# EAGLE board PowerBoard_4Array (EAGLE 5.07)
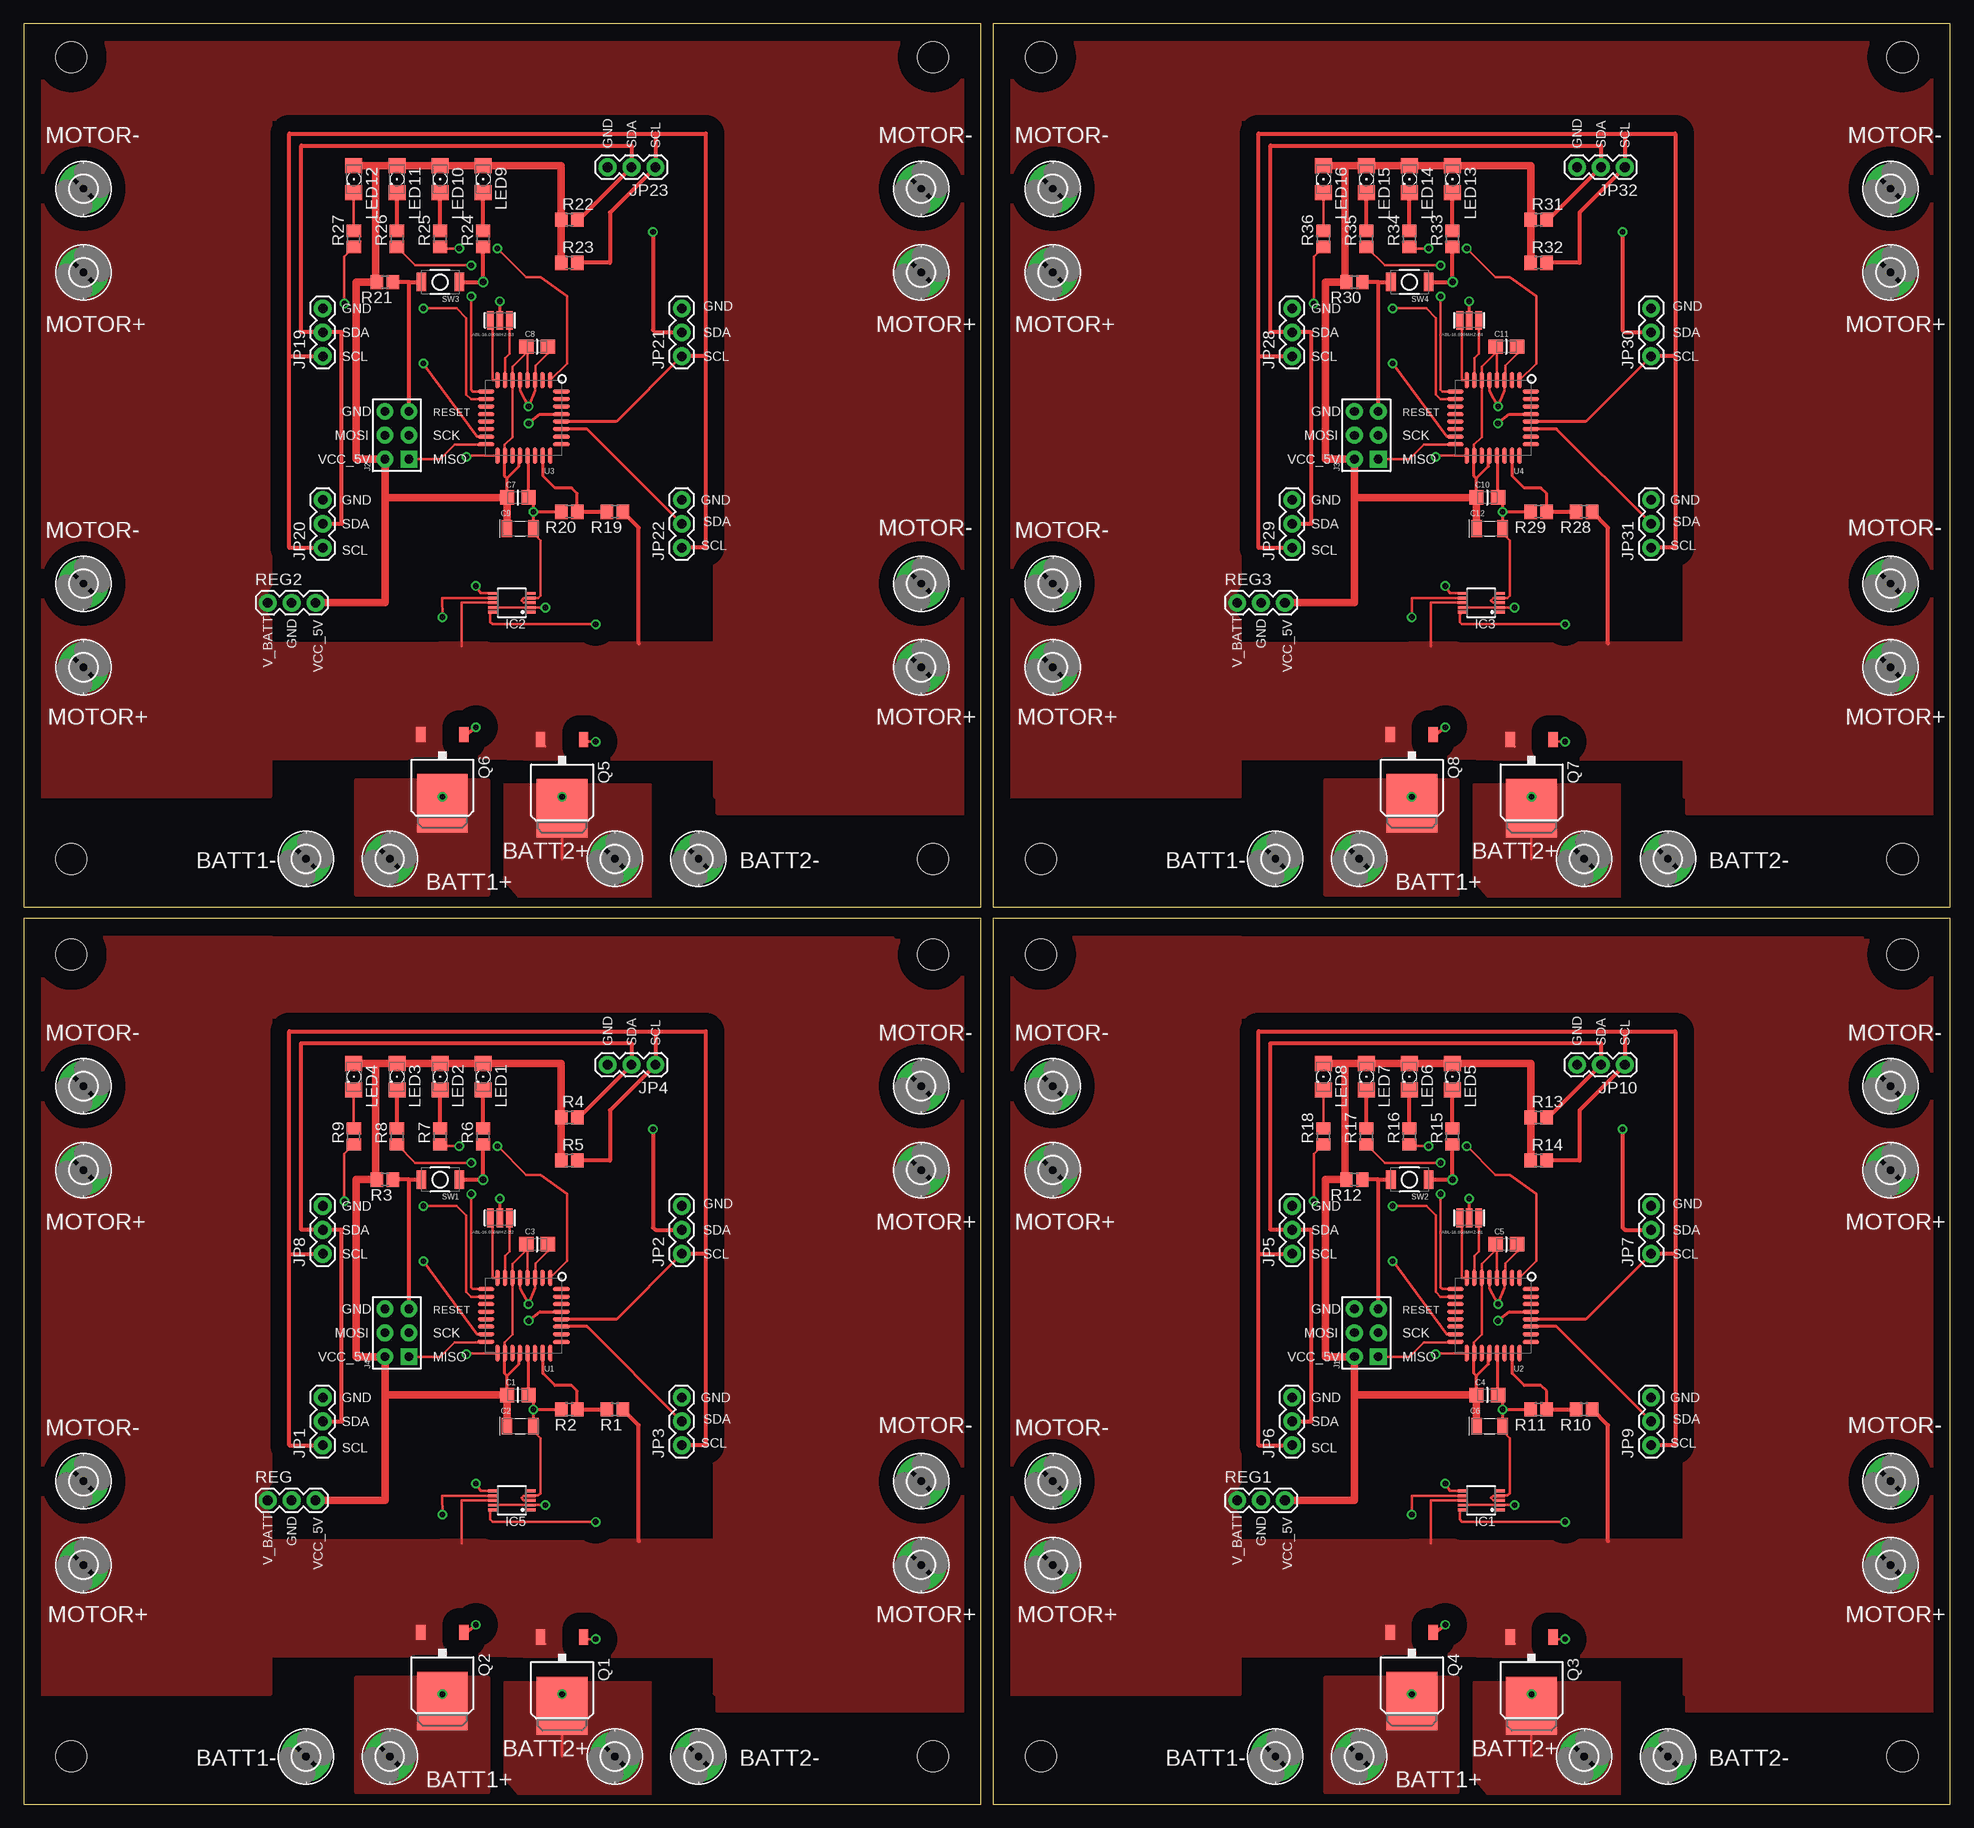
[diagram p0: board, top side]
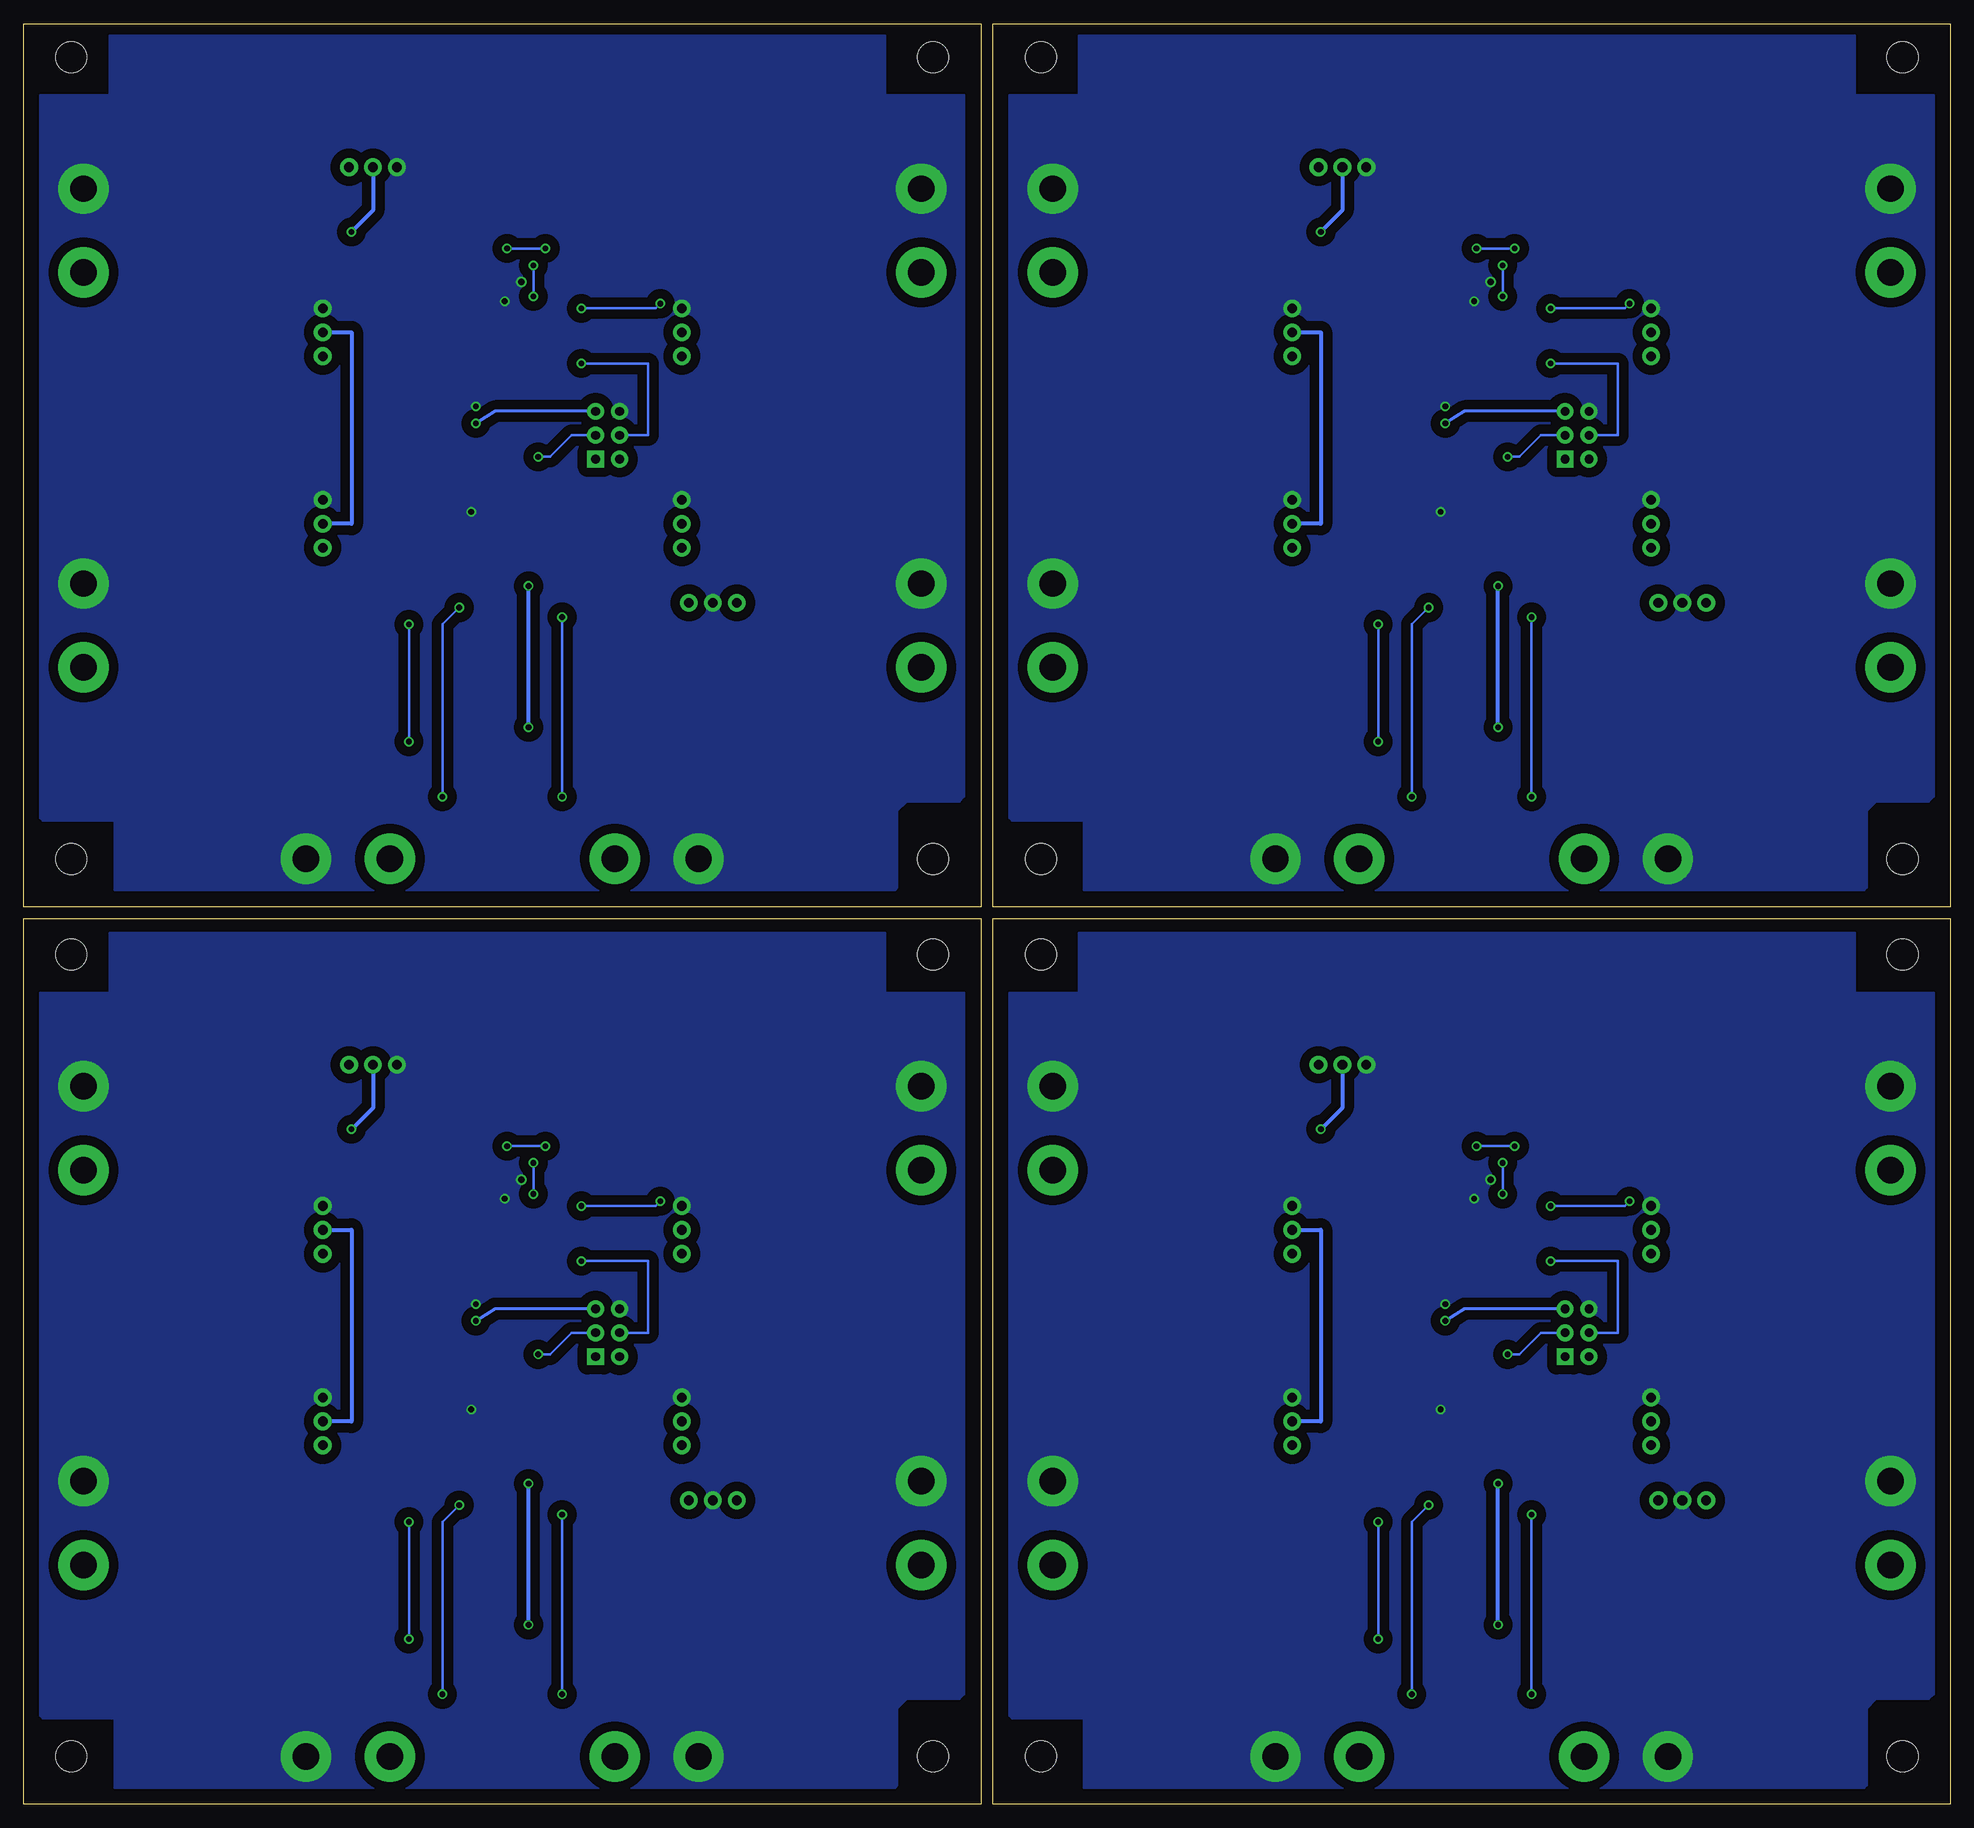
[diagram p1: board, bottom side, seen from below]

Size 204.47 x 188.98 mm. Coordinates in mm from the lower left corner, seen from the top.
Outline: 0,0 101.6,0 101.6,93.98 0,93.98 0,0
Outline: 102.87,0 204.47,0 204.47,93.98 102.87,93.98 102.87,0
Outline: 0,95.25 101.6,95.25 101.6,188.98 0,188.98 0,95.25
Outline: 102.87,95.25 204.47,95.25 204.47,188.98 102.87,188.98 102.87,95.25
Copper layers (1*16): Top 0.035mm / dielectric 1.5mm / Bottom 0.035mm
Design rules "default": minimum track width 10mil, minimum drill 24mil, track to track 8mil, track to pad 8mil, pad to pad 8mil, via to via 8mil, smd to smd 8mil, copper to edge 40mil, drill to drill 8mil, minimum pad ring 10mil, minimum via ring 8mil, stop-mask expansion 4mil, vias tented up to drill 0mil, thermal gap 10mil

## Footprints (pad centres in the part's own frame; a part is rotated, then mirrored left to right if it is on the bottom)
RESONATOR = smd 0.7 x 2: 1 -1,0; 2 0,0; 3 1,0
CAP0805-NP = smd 1.524 x 1.524: 1 0,0; 2 2.286,0
TAN-A = smd 1.118 x 1.778: 1 0,0; 2 2.794,0
2,8-PAD = drill 2.8 pad 5.334 round: B2,8 0,0
MSOP10 = smd 0.31 x 0.9: 1 -1,-2.05; 2 -0.5,-2.05; 3 0,-2.05; 4 0.5,-2.05; 5 1,-2.05; 6 1,2.05; 7 0.5,2.05; 8 0,2.05; 9 -0.5,2.05; 10 -1,2.05
HEAD3X2 = drill 0.914 pad 1.778 square: 1 0,0 | drill 0.914 pad 1.778 round: 2 0,2.54; 3 2.54,0; 4 2.54,2.54; 5 5.08,0; 6 5.08,2.54
1X03 = drill 1.016 pad 1.88 round: 1 0,0; 2 2.54,0; 3 5.08,0
STAND-OFF = hole 3.302: 0,0
1206 = smd 1.6 x 1.803: A -1.422,0; C 1.422,0
D-PAK_TO252AA = smd 1 x 1.6: 1 -2.28,-4.8; 3 2.28,-4.8 | smd 5.4 x 6.2: 4 0,2.5
R0805 = smd 1.3 x 1.5: 1 -0.85,0; 2 0.85,0
157SW = smd 1.016 x 1.981: 1 0,0; 2 4,0
QFP032 = smd 0.432 x 1.778: 1 0,0; 2 0.8,0; 3 1.599,0; 4 2.399,0; 5 3.199,0; 6 3.998,0; 7 4.798,0; 8 5.598,0; 17 5.588,8.001; 18 4.798,7.997; 19 3.998,7.997; 20 3.199,7.997; 21 2.399,7.997; 22 1.599,7.997; 23 0.799,7.997; 24 0,7.997 | smd 1.778 x 0.432: 9 6.807,1.194; 10 6.807,2.007; 11 6.807,2.794; 12 6.807,3.607; 13 6.807,4.394; 14 6.807,5.182; 15 6.807,5.994; 16 6.816,6.803; 25 -1.194,6.807; 26 -1.194,5.994; 27 -1.194,5.182; 28 -1.194,4.394; 29 -1.194,3.607; 30 -1.194,2.794; 31 -1.194,2.007; 32 -1.194,1.194

## Placement (x,y rotation side)
ABL-16.000MHZ-B1  16MHz  [RESONATOR]  153.42,62.23 180 top
ABL-16.000MHZ-B2  16MHz  [RESONATOR]  50.55,62.23 180 top
ABL-16.000MHZ-B3  16MHz  [RESONATOR]  50.55,157.48 180 top
ABL-16.000MHZ-B4  16MHz  [RESONATOR]  153.42,157.48 180 top
C1  0.1uF  [CAP0805-NP]  51.31,43.43 0 top
C2  4.7uF  [TAN-A]  51.31,40.13 0 top
C3  0.1uF  [CAP0805-NP]  53.34,59.44 0 top
C4  0.1uF  [CAP0805-NP]  154.18,43.43 0 top
C5  0.1uF  [CAP0805-NP]  156.21,59.44 0 top
C6  4.7uF  [TAN-A]  154.18,40.13 0 top
C7  0.1uF  [CAP0805-NP]  51.31,138.68 0 top
C8  0.1uF  [CAP0805-NP]  53.34,154.69 0 top
C9  4.7uF  [TAN-A]  51.31,135.38 0 top
C10  0.1uF  [CAP0805-NP]  154.18,138.68 0 top
C11  0.1uF  [CAP0805-NP]  156.21,154.69 0 top
C12  4.7uF  [TAN-A]  154.18,135.38 0 top
H1  MOUNT-PAD-ROUND2.8  [2,8-PAD]  6.35,25.4 0 top
H2  MOUNT-PAD-ROUND2.8  [2,8-PAD]  6.35,34.29 0 top
H3  MOUNT-PAD-ROUND2.8  [2,8-PAD]  6.35,67.31 0 top
H4  MOUNT-PAD-ROUND2.8  [2,8-PAD]  6.35,76.2 0 top
H5  MOUNT-PAD-ROUND2.8  [2,8-PAD]  95.25,25.4 0 top
H6  MOUNT-PAD-ROUND2.8  [2,8-PAD]  95.25,34.29 0 top
H7  MOUNT-PAD-ROUND2.8  [2,8-PAD]  95.25,67.31 0 top
H8  MOUNT-PAD-ROUND2.8  [2,8-PAD]  95.25,76.2 0 top
H9  MOUNT-PAD-ROUND2.8  [2,8-PAD]  62.74,5.08 0 top
H10  MOUNT-PAD-ROUND2.8  [2,8-PAD]  29.97,5.08 0 top
H11  MOUNT-PAD-ROUND2.8  [2,8-PAD]  38.86,5.08 0 top
H12  MOUNT-PAD-ROUND2.8  [2,8-PAD]  71.63,5.08 0 top
H13  MOUNT-PAD-ROUND2.8  [2,8-PAD]  109.22,25.4 0 top
H14  MOUNT-PAD-ROUND2.8  [2,8-PAD]  109.22,34.29 0 top
H15  MOUNT-PAD-ROUND2.8  [2,8-PAD]  109.22,67.31 0 top
H16  MOUNT-PAD-ROUND2.8  [2,8-PAD]  109.22,76.2 0 top
H17  MOUNT-PAD-ROUND2.8  [2,8-PAD]  198.12,25.4 0 top
H18  MOUNT-PAD-ROUND2.8  [2,8-PAD]  198.12,34.29 0 top
H19  MOUNT-PAD-ROUND2.8  [2,8-PAD]  198.12,67.31 0 top
H20  MOUNT-PAD-ROUND2.8  [2,8-PAD]  198.12,76.2 0 top
H21  MOUNT-PAD-ROUND2.8  [2,8-PAD]  165.61,5.08 0 top
H22  MOUNT-PAD-ROUND2.8  [2,8-PAD]  132.84,5.08 0 top
H23  MOUNT-PAD-ROUND2.8  [2,8-PAD]  141.73,5.08 0 top
H24  MOUNT-PAD-ROUND2.8  [2,8-PAD]  174.5,5.08 0 top
H25  MOUNT-PAD-ROUND2.8  [2,8-PAD]  6.35,120.65 0 top
H26  MOUNT-PAD-ROUND2.8  [2,8-PAD]  6.35,129.54 0 top
H27  MOUNT-PAD-ROUND2.8  [2,8-PAD]  6.35,162.56 0 top
H28  MOUNT-PAD-ROUND2.8  [2,8-PAD]  6.35,171.45 0 top
H29  MOUNT-PAD-ROUND2.8  [2,8-PAD]  95.25,120.65 0 top
H30  MOUNT-PAD-ROUND2.8  [2,8-PAD]  95.25,129.54 0 top
H31  MOUNT-PAD-ROUND2.8  [2,8-PAD]  95.25,162.56 0 top
H32  MOUNT-PAD-ROUND2.8  [2,8-PAD]  95.25,171.45 0 top
H33  MOUNT-PAD-ROUND2.8  [2,8-PAD]  62.74,100.33 0 top
H34  MOUNT-PAD-ROUND2.8  [2,8-PAD]  29.97,100.33 0 top
H35  MOUNT-PAD-ROUND2.8  [2,8-PAD]  38.86,100.33 0 top
H36  MOUNT-PAD-ROUND2.8  [2,8-PAD]  71.63,100.33 0 top
H37  MOUNT-PAD-ROUND2.8  [2,8-PAD]  109.22,120.65 0 top
H38  MOUNT-PAD-ROUND2.8  [2,8-PAD]  109.22,129.54 0 top
H39  MOUNT-PAD-ROUND2.8  [2,8-PAD]  109.22,162.56 0 top
H40  MOUNT-PAD-ROUND2.8  [2,8-PAD]  109.22,171.45 0 top
H41  MOUNT-PAD-ROUND2.8  [2,8-PAD]  198.12,120.65 0 top
H42  MOUNT-PAD-ROUND2.8  [2,8-PAD]  198.12,129.54 0 top
H43  MOUNT-PAD-ROUND2.8  [2,8-PAD]  198.12,162.56 0 top
H44  MOUNT-PAD-ROUND2.8  [2,8-PAD]  198.12,171.45 0 top
H45  MOUNT-PAD-ROUND2.8  [2,8-PAD]  165.61,100.33 0 top
H46  MOUNT-PAD-ROUND2.8  [2,8-PAD]  132.84,100.33 0 top
H47  MOUNT-PAD-ROUND2.8  [2,8-PAD]  141.73,100.33 0 top
H48  MOUNT-PAD-ROUND2.8  [2,8-PAD]  174.5,100.33 0 top
IC1  LTC4416EMS  [MSOP10]  154.69,32.26 90 top
IC2  LTC4416EMS  [MSOP10]  51.82,127.51 90 top
IC3  LTC4416EMS  [MSOP10]  154.69,127.51 90 top
IC5  LTC4416EMS  [MSOP10]  51.82,32.26 90 top
J1  HEAD3X2  [HEAD3X2]  143.76,47.5 90 top
J2  HEAD3X2  [HEAD3X2]  40.89,142.75 90 top
J3  HEAD3X2  [HEAD3X2]  143.76,142.75 90 top
J4  HEAD3X2  [HEAD3X2]  40.89,47.5 90 top
JP1  [1X03]  31.75,38.1 90 top
JP2  [1X03]  69.85,58.42 90 top
JP3  [1X03]  69.85,38.1 90 top
JP4  [1X03]  67.06,78.49 180 top
JP5  [1X03]  134.62,58.42 90 top
JP6  [1X03]  134.62,38.1 90 top
JP7  [1X03]  172.72,58.42 90 top
JP8  [1X03]  31.75,58.42 90 top
JP9  [1X03]  172.72,38.1 90 top
JP10  [1X03]  169.93,78.49 180 top
JP11  STAND-OFF  [STAND-OFF]  199.39,90.17 0 top
JP12  STAND-OFF  [STAND-OFF]  96.52,90.17 0 top
JP13  STAND-OFF  [STAND-OFF]  5.08,90.17 0 top
JP14  STAND-OFF  [STAND-OFF]  96.52,5.08 0 top
JP15  STAND-OFF  [STAND-OFF]  5.08,5.08 0 top
JP16  STAND-OFF  [STAND-OFF]  107.95,90.17 0 top
JP17  STAND-OFF  [STAND-OFF]  199.39,5.08 0 top
JP18  STAND-OFF  [STAND-OFF]  107.95,5.08 0 top
JP19  [1X03]  31.75,153.67 90 top
JP20  [1X03]  31.75,133.35 90 top
JP21  [1X03]  69.85,153.67 90 top
JP22  [1X03]  69.85,133.35 90 top
JP23  [1X03]  67.06,173.74 180 top
JP24  STAND-OFF  [STAND-OFF]  96.52,185.42 0 top
JP25  STAND-OFF  [STAND-OFF]  5.08,185.42 0 top
JP26  STAND-OFF  [STAND-OFF]  96.52,100.33 0 top
JP27  STAND-OFF  [STAND-OFF]  5.08,100.33 0 top
JP28  [1X03]  134.62,153.67 90 top
JP29  [1X03]  134.62,133.35 90 top
JP30  [1X03]  172.72,153.67 90 top
JP31  [1X03]  172.72,133.35 90 top
JP32  [1X03]  169.93,173.74 180 top
JP33  STAND-OFF  [STAND-OFF]  199.39,185.42 0 top
JP34  STAND-OFF  [STAND-OFF]  107.95,185.42 0 top
JP35  STAND-OFF  [STAND-OFF]  199.39,100.33 0 top
JP36  STAND-OFF  [STAND-OFF]  107.95,100.33 0 top
LED1  [1206]  48.77,77.22 270 top
LED2  [1206]  44.2,77.22 270 top
LED3  [1206]  39.62,77.22 270 top
LED4  [1206]  35.05,77.22 270 top
LED5  [1206]  151.64,77.22 270 top
LED6  [1206]  147.07,77.22 270 top
LED7  [1206]  142.49,77.22 270 top
LED8  [1206]  137.92,77.22 270 top
LED9  [1206]  48.77,172.47 270 top
LED10  [1206]  44.2,172.47 270 top
LED11  [1206]  39.62,172.47 270 top
LED12  [1206]  35.05,172.47 270 top
LED13  [1206]  151.64,172.47 270 top
LED14  [1206]  147.07,172.47 270 top
LED15  [1206]  142.49,172.47 270 top
LED16  [1206]  137.92,172.47 270 top
Q1  IRFR5305  [D-PAK_TO252AA]  57.15,12.95 180 top
Q2  IRFR5305  [D-PAK_TO252AA]  44.45,13.46 180 top
Q3  IRFR5305  [D-PAK_TO252AA]  160.02,12.95 180 top
Q4  IRFR5305  [D-PAK_TO252AA]  147.32,13.46 180 top
Q5  IRFR5305  [D-PAK_TO252AA]  57.15,108.2 180 top
Q6  IRFR5305  [D-PAK_TO252AA]  44.45,108.71 180 top
Q7  IRFR5305  [D-PAK_TO252AA]  160.02,108.2 180 top
Q8  IRFR5305  [D-PAK_TO252AA]  147.32,108.71 180 top
R1  6k8  [R0805]  62.74,41.91 180 top
R2  3k3  [R0805]  57.91,41.91 180 top
R3  1k8  [R0805]  38.35,66.29 180 top
R4  1k8  [R0805]  57.91,72.9 0 top
R5  1k8  [R0805]  57.91,68.33 0 top
R6  680  [R0805]  48.77,70.87 90 top
R7  680  [R0805]  44.2,70.87 90 top
R8  680  [R0805]  39.62,70.87 90 top
R9  680  [R0805]  35.05,70.87 90 top
R10  6k8  [R0805]  165.61,41.91 180 top
R11  3k3  [R0805]  160.78,41.91 180 top
R12  1k8  [R0805]  141.22,66.29 180 top
R13  1k8  [R0805]  160.78,72.9 0 top
R14  1k8  [R0805]  160.78,68.33 0 top
R15  680  [R0805]  151.64,70.87 90 top
R16  680  [R0805]  147.07,70.87 90 top
R17  680  [R0805]  142.49,70.87 90 top
R18  680  [R0805]  137.92,70.87 90 top
R19  6k8  [R0805]  62.74,137.16 180 top
R20  3k3  [R0805]  57.91,137.16 180 top
R21  1k8  [R0805]  38.35,161.54 180 top
R22  1k8  [R0805]  57.91,168.15 0 top
R23  1k8  [R0805]  57.91,163.58 0 top
R24  680  [R0805]  48.77,166.12 90 top
R25  680  [R0805]  44.2,166.12 90 top
R26  680  [R0805]  39.62,166.12 90 top
R27  680  [R0805]  35.05,166.12 90 top
R28  6k8  [R0805]  165.61,137.16 180 top
R29  3k3  [R0805]  160.78,137.16 180 top
R30  1k8  [R0805]  141.22,161.54 180 top
R31  1k8  [R0805]  160.78,168.15 0 top
R32  1k8  [R0805]  160.78,163.58 0 top
R33  680  [R0805]  151.64,166.12 90 top
R34  680  [R0805]  147.07,166.12 90 top
R35  680  [R0805]  142.49,166.12 90 top
R36  680  [R0805]  137.92,166.12 90 top
REG  [1X03]  25.91,32.26 0 top
REG1  [1X03]  128.78,32.26 0 top
REG2  [1X03]  25.91,127.51 0 top
REG3  [1X03]  128.78,127.51 0 top
SW1  RESET  [157SW]  46.23,66.29 180 top
SW2  RESET  [157SW]  149.1,66.29 180 top
SW3  RESET  [157SW]  46.23,161.54 180 top
SW4  RESET  [157SW]  149.1,161.54 180 top
U1  ATMEGA168-20AU  [QFP032]  55.88,55.88 180 top
U2  ATMEGA168-20AU  [QFP032]  158.75,55.88 180 top
U3  ATMEGA168-20AU  [QFP032]  55.88,151.13 180 top
U4  ATMEGA168-20AU  [QFP032]  158.75,151.13 180 top

## Library data of the parts
ABL-16.000MHZ-B1-ABL-16.000MHZ-B4 = MySMD2
C1-C12 SW1-SW4 U1-U4 = MySMD
H1-H48 = holes
IC1-IC3 IC5 = linear-technology-3
J1-J4 = MyCON2
JP1-JP36 REG REG1-REG3 = SparkFun
LED1-LED16 = led
Q1-Q8 = transistor-power
R1-R36 = resistor

## Nets
D11/MOSI: J4.4 U1.15
D11/MOSI1: J1.4 U2.15
D11/MOSI2: J2.4 U3.15
D11/MOSI3: J3.4 U4.15
D12/MISO: J4.1 U1.16
D12/MISO1: J1.1 U2.16
D12/MISO2: J2.1 U3.16
D12/MISO3: J3.1 U4.16
D13/SCK: J4.3 U1.17
D13/SCK1: J1.3 U2.17
D13/SCK2: J2.3 U3.17
D13/SCK3: J3.3 U4.17
GND: ABL-16.000MHZ-B2.2 C1.2 C2.2 C3.2 H2.B2,8 H4.B2,8 H6.B2,8 H8.B2,8 H10.B2,8 H12.B2,8 IC5.3 IC5.4 J4.6 JP1.3 JP2.3 JP3.3 JP4.3 JP8.3 R2.2 R6.1 REG.2 SW1.1 U1.3 U1.5 U1.21
GND1: ABL-16.000MHZ-B1.2 C4.2 C5.2 C6.2 H14.B2,8 H16.B2,8 H18.B2,8 H20.B2,8 H22.B2,8 H24.B2,8 IC1.3 IC1.4 J1.6 JP5.3 JP6.3 JP7.3 JP9.3 JP10.3 R11.2 R15.1 REG1.2 SW2.1 U2.3 U2.5 U2.21
GND2: ABL-16.000MHZ-B3.2 C7.2 C8.2 C9.2 H26.B2,8 H28.B2,8 H30.B2,8 H32.B2,8 H34.B2,8 H36.B2,8 IC2.3 IC2.4 J2.6 JP19.3 JP20.3 JP21.3 JP22.3 JP23.3 R20.2 R24.1 REG2.2 SW3.1 U3.3 U3.5 U3.21
GND3: ABL-16.000MHZ-B4.2 C10.2 C11.2 C12.2 H38.B2,8 H40.B2,8 H42.B2,8 H44.B2,8 H46.B2,8 H48.B2,8 IC3.3 IC3.4 J3.6 JP28.3 JP29.3 JP30.3 JP31.3 JP32.3 R29.2 R33.1 REG3.2 SW4.1 U4.3 U4.5 U4.21
LED1: R7.1 U1.1
LED2: R8.1 U1.9
LED3: R9.1 U1.10
LED4: R16.1 U2.1
LED5: R17.1 U2.9
LED6: R18.1 U2.10
LED7: R25.1 U3.1
LED8: R26.1 U3.9
LED9: R27.1 U3.10
LED10: R34.1 U4.1
LED11: R35.1 U4.9
LED12: R36.1 U4.10
N$1: ABL-16.000MHZ-B2.3 U1.8
N$2: ABL-16.000MHZ-B2.1 U1.7
N$3: LED1.C R6.2
N$4: LED2.C R7.2
N$5: LED3.C R8.2
N$6: LED4.C R9.2
N$7: IC5.10 Q1.1
N$8: IC5.6 Q2.1
N$9: ABL-16.000MHZ-B1.1 U2.7
N$10: ABL-16.000MHZ-B1.3 U2.8
N$11: LED5.C R15.2
N$12: LED6.C R16.2
N$13: LED7.C R17.2
N$14: LED8.C R18.2
N$15: IC1.10 Q3.1
N$16: IC1.6 Q4.1
N$17: ABL-16.000MHZ-B3.1 U3.7
N$18: ABL-16.000MHZ-B3.3 U3.8
N$19: LED9.C R24.2
N$20: LED10.C R25.2
N$21: LED11.C R26.2
N$22: LED12.C R27.2
N$23: IC2.10 Q5.1
N$24: IC2.6 Q6.1
N$25: ABL-16.000MHZ-B4.1 U4.7
N$26: ABL-16.000MHZ-B4.3 U4.8
N$27: LED13.C R33.2
N$28: LED14.C R34.2
N$29: LED15.C R35.2
N$30: LED16.C R36.2
N$31: IC3.10 Q7.1
N$32: IC3.6 Q8.1
RESET: J4.5 R3.1 SW1.2 U1.29
RESET1: J1.5 R12.1 SW2.2 U2.29
RESET2: J2.5 R21.1 SW3.2 U3.29
RESET3: J3.5 R30.1 SW4.2 U4.29
SCL: JP1.1 JP2.1 JP3.1 JP4.1 JP8.1 R5.2 U1.28
SCL1: JP5.1 JP6.1 JP7.1 JP9.1 JP10.1 R14.2 U2.28
SCL2: JP19.1 JP20.1 JP21.1 JP22.1 JP23.1 R23.2 U3.28
SCL3: JP28.1 JP29.1 JP30.1 JP31.1 JP32.1 R32.2 U4.28
SDA: JP1.2 JP2.2 JP3.2 JP4.2 JP8.2 R4.2 U1.27
SDA1: JP5.2 JP6.2 JP7.2 JP9.2 JP10.2 R13.2 U2.27
SDA2: JP19.2 JP20.2 JP21.2 JP22.2 JP23.2 R22.2 U3.27
SDA3: JP28.2 JP29.2 JP30.2 JP31.2 JP32.2 R31.2 U4.27
V_BATT: H1.B2,8 H3.B2,8 H5.B2,8 H7.B2,8 IC5.8 Q1.3 Q2.3 R1.1 REG.1
V_BATT1: H9.B2,8 IC5.2 IC5.9 Q1.4
V_BATT2: H11.B2,8 IC5.7 Q2.4
V_BATT3: H13.B2,8 H15.B2,8 H17.B2,8 H19.B2,8 IC1.8 Q3.3 Q4.3 R10.1 REG1.1
V_BATT4: H21.B2,8 IC1.2 IC1.9 Q3.4
V_BATT5: H23.B2,8 IC1.7 Q4.4
V_BATT6: H25.B2,8 H27.B2,8 H29.B2,8 H31.B2,8 IC2.8 Q5.3 Q6.3 R19.1 REG2.1
V_BATT7: H33.B2,8 IC2.2 IC2.9 Q5.4
V_BATT8: H35.B2,8 IC2.7 Q6.4
V_BATT9: H37.B2,8 H39.B2,8 H41.B2,8 H43.B2,8 IC3.8 Q7.3 Q8.3 R28.1 REG3.1
V_BATT10: H45.B2,8 IC3.2 IC3.9 Q7.4
V_BATT11: H47.B2,8 IC3.7 Q8.4
V_BATT_ADC: R1.2 R2.1 U1.23
V_BATT_ADC1: R10.2 R11.1 U2.23
V_BATT_ADC2: R19.2 R20.1 U3.23
V_BATT_ADC3: R28.2 R29.1 U4.23
VCC_5V: C1.1 C2.1 C3.1 J4.2 LED1.A LED2.A LED3.A LED4.A R3.2 R4.1 R5.1 REG.3 U1.4 U1.6 U1.18 U1.20
VCC_5V1: C4.1 C5.1 C6.1 J1.2 LED5.A LED6.A LED7.A LED8.A R12.2 R13.1 R14.1 REG1.3 U2.4 U2.6 U2.18 U2.20
VCC_5V2: C7.1 C8.1 C9.1 J2.2 LED9.A LED10.A LED11.A LED12.A R21.2 R22.1 R23.1 REG2.3 U3.4 U3.6 U3.18 U3.20
VCC_5V3: C10.1 C11.1 C12.1 J3.2 LED13.A LED14.A LED15.A LED16.A R30.2 R31.1 R32.1 REG3.3 U4.4 U4.6 U4.18 U4.20

## Tracks (layer width: path | path; a pad name or v marks a point on that pad's centre or on a via)
D11/MOSI  (via drill 0.6)
  Top 0.254: U1.15 48.16,49.89 v42.42,57.66
  Bottom 0.254: v42.42,57.66 35.31,57.66 35.31,50.04 J4.4
D11/MOSI1  (via drill 0.6)
  Top 0.254: U2.15 151.03,49.89 v145.29,57.66
  Bottom 0.254: v145.29,57.66 138.18,57.66 138.18,50.04 J1.4
D11/MOSI2  (via drill 0.6)
  Top 0.254: U3.15 48.16,145.14 v42.42,152.91
  Bottom 0.254: v42.42,152.91 35.31,152.91 35.31,145.29 J2.4
D11/MOSI3  (via drill 0.6)
  Top 0.254: U4.15 151.03,145.14 v145.29,152.91
  Bottom 0.254: v145.29,152.91 138.18,152.91 138.18,145.29 J3.4
D12/MISO
  Top 0.254: U1.16 49.01,49.02 45.72,49.02 44.2,47.5 J4.1
D12/MISO1
  Top 0.254: U2.16 151.88,49.02 148.59,49.02 147.07,47.5 J1.1
D12/MISO2
  Top 0.254: U3.16 49.01,144.27 45.72,144.27 44.2,142.75 J2.1
D12/MISO3
  Top 0.254: U4.16 151.88,144.27 148.59,144.27 147.07,142.75 J3.1
D13/SCK  (via drill 0.6)
  Top 0.254: U1.17 47.12,47.88 v46.99,47.75
  Bottom 0.254: J4.3 43.43,50.04 45.72,47.75 v46.99,47.75
D13/SCK1  (via drill 0.6)
  Top 0.254: U2.17 149.99,47.88 v149.86,47.75
  Bottom 0.254: J1.3 146.3,50.04 148.59,47.75 v149.86,47.75
D13/SCK2  (via drill 0.6)
  Top 0.254: U3.17 47.12,143.13 v46.99,143
  Bottom 0.254: J2.3 43.43,145.29 45.72,143 v46.99,143
D13/SCK3  (via drill 0.6)
  Top 0.254: U4.17 149.99,143.13 v149.86,143
  Bottom 0.254: J3.3 146.3,145.29 148.59,143 v149.86,143
GND  (via drill 0.6, 0.7)
  Top 0.254: U1.3 54.36,56.06 54.36,57.4 55.63,58.67 C3.2 | U1.3 54.36,55.95 | U1.3 54.28,54.79 v53.59,53.09 52.68,54.76 U1.5 | IC5.3 53.09,32.26 52.83,32.51 53.08,32.76 IC5.4 54.61,32.77 54.86,33.02 54.86,38.86 54.1,39.62 C2.2
  Top 0.305: U1.21 53.59,47.77 C1.2 54.1,42.93 v54.1,41.91 | v54.1,41.91 R2.2 | C2.2 v54.1,41.91 | ABL-16.000MHZ-B2.2 v50.55,64.26
  Top 0.406: SW1.1 v48.77,66.29 R6.1
  pour Bottom (isolate 1.016, no thermals): 1.78,86.11 10.16,86.11 10.16,92.46 92.46,92.46 92.46,86.11 99.82,86.11 99.82,9.4 99.57,9.14 91.95,9.14 91.95,1.78 9.14,1.78 8.89,2.03 8.89,10.16 7.87,11.18 2.29,11.18 1.78,11.68
GND1  (via drill 0.6, 0.7)
  Top 0.254: U2.3 157.23,56.06 157.23,57.4 158.5,58.67 C5.2 | U2.3 157.23,55.95 | U2.3 157.15,54.79 v156.46,53.09 155.55,54.76 U2.5 | IC1.3 155.96,32.26 155.7,32.51 155.95,32.76 IC1.4 157.48,32.77 157.73,33.02 157.73,38.86 156.97,39.62 C6.2
  Top 0.305: U2.21 156.46,47.77 C4.2 156.97,42.93 v156.97,41.91 | v156.97,41.91 R11.2 | C6.2 v156.97,41.91 | ABL-16.000MHZ-B1.2 v153.42,64.26
  Top 0.406: SW2.1 v151.64,66.29 R15.1
  pour Bottom (isolate 1.016, no thermals): 104.65,86.11 113.03,86.11 113.03,92.46 195.33,92.46 195.33,86.11 202.69,86.11 202.69,9.4 202.44,9.14 194.82,9.14 194.82,1.78 112.01,1.78 111.76,2.03 111.76,10.16 110.74,11.18 105.16,11.18 104.65,11.68
GND2  (via drill 0.6, 0.7)
  Top 0.254: U3.3 54.36,151.31 54.36,152.65 55.63,153.92 C8.2 | U3.3 54.36,151.21 | U3.3 54.28,150.04 v53.59,148.34 52.68,150.01 U3.5 | IC2.3 53.09,127.51 52.83,127.76 53.08,128.01 IC2.4 54.61,128.02 54.86,128.27 54.86,134.11 54.1,134.87 C9.2
  Top 0.305: U3.21 53.59,143.02 C7.2 54.1,138.18 v54.1,137.16 | v54.1,137.16 R20.2 | C9.2 v54.1,137.16 | ABL-16.000MHZ-B3.2 v50.55,159.51
  Top 0.406: SW3.1 v48.77,161.54 R24.1
  pour Bottom (isolate 1.016, no thermals): 1.78,181.36 10.16,181.36 10.16,187.71 92.46,187.71 92.46,181.36 99.82,181.36 99.82,104.65 99.57,104.39 91.95,104.39 91.95,97.03 9.14,97.03 8.89,97.28 8.89,105.41 7.87,106.43 2.29,106.43 1.78,106.93
GND3  (via drill 0.6, 0.7)
  Top 0.254: U4.3 157.23,151.31 157.23,152.65 158.5,153.92 C11.2 | U4.3 157.23,151.21 | U4.3 157.15,150.04 v156.46,148.34 155.55,150.01 U4.5 | IC3.3 155.96,127.51 155.7,127.76 155.95,128.01 IC3.4 157.48,128.02 157.73,128.27 157.73,134.11 156.97,134.87 C12.2
  Top 0.305: U4.21 156.46,143.02 C10.2 156.97,138.18 v156.97,137.16 | v156.97,137.16 R29.2 | C12.2 v156.97,137.16 | ABL-16.000MHZ-B4.2 v153.42,159.51
  Top 0.406: SW4.1 v151.64,161.54 R33.1
  pour Bottom (isolate 1.016, no thermals): 104.65,181.36 113.03,181.36 113.03,187.71 195.33,187.71 195.33,181.36 202.69,181.36 202.69,104.65 202.44,104.39 194.82,104.39 194.82,97.03 112.01,97.03 111.76,97.28 111.76,105.41 110.74,106.43 105.16,106.43 104.65,106.93
LED1  (via drill 0.6)
  Top 0.254: R7.1 44.36,69.85 v46.23,69.85 | v50.29,69.85 53.34,66.8 54.86,66.8 57.66,64.77 57.66,57.66 U1.1
  Bottom 0.254: v50.29,69.85 v46.23,69.85
LED2  (via drill 0.6)
  Top 0.254: U1.9 47.68,54.69 47.5,54.86 v47.5,64.77 | R8.1 41.57,68.07 v47.5,68.07
  Bottom 0.254: v47.5,64.77 v47.5,68.07
LED3  (via drill 0.6)
  Top 0.254: U1.10 47.47,53.87 46.99,54.36 46.99,62.48 45.97,63.5 v42.42,63.5 | R9.1 34.04,69 v34.04,64.01
  Bottom 0.254: v42.42,63.5 34.54,63.5 v34.04,64.01
LED4  (via drill 0.6)
  Top 0.254: R16.1 147.23,69.85 v149.1,69.85 | v153.16,69.85 156.21,66.8 157.73,66.8 160.53,64.77 160.53,57.66 U2.1
  Bottom 0.254: v153.16,69.85 v149.1,69.85
LED5  (via drill 0.6)
  Top 0.254: U2.9 150.55,54.69 150.37,54.86 v150.37,64.77 | R17.1 144.44,68.07 v150.37,68.07
  Bottom 0.254: v150.37,64.77 v150.37,68.07
LED6  (via drill 0.6)
  Top 0.254: U2.10 150.34,53.87 149.86,54.36 149.86,62.48 148.84,63.5 v145.29,63.5 | R18.1 136.91,69 v136.91,64.01
  Bottom 0.254: v145.29,63.5 137.41,63.5 v136.91,64.01
LED7  (via drill 0.6)
  Top 0.254: R25.1 44.36,165.1 v46.23,165.1 | v50.29,165.1 53.34,162.05 54.86,162.05 57.66,160.02 57.66,152.91 U3.1
  Bottom 0.254: v50.29,165.1 v46.23,165.1
LED8  (via drill 0.6)
  Top 0.254: U3.9 47.68,149.94 47.5,150.11 v47.5,160.02 | R26.1 41.57,163.32 v47.5,163.32
  Bottom 0.254: v47.5,160.02 v47.5,163.32
LED9  (via drill 0.6)
  Top 0.254: U3.10 47.47,149.12 46.99,149.61 46.99,157.73 45.97,158.75 v42.42,158.75 | R27.1 34.04,164.25 v34.04,159.26
  Bottom 0.254: v42.42,158.75 34.54,158.75 v34.04,159.26
LED10  (via drill 0.6)
  Top 0.254: R34.1 147.23,165.1 v149.1,165.1 | v153.16,165.1 156.21,162.05 157.73,162.05 160.53,160.02 160.53,152.91 U4.1
  Bottom 0.254: v153.16,165.1 v149.1,165.1
LED11  (via drill 0.6)
  Top 0.254: U4.9 150.55,149.94 150.37,150.11 v150.37,160.02 | R35.1 144.44,163.32 v150.37,163.32
  Bottom 0.254: v150.37,160.02 v150.37,163.32
LED12  (via drill 0.6)
  Top 0.254: U4.10 150.34,149.12 149.86,149.61 149.86,157.73 148.84,158.75 v145.29,158.75 | R36.1 136.91,164.25 v136.91,159.26
  Bottom 0.254: v145.29,158.75 137.41,158.75 v136.91,159.26
N$1
  Top 0.254: ABL-16.000MHZ-B2.3 49.77,62.23 49.77,55.88 U1.8
N$2
  Top 0.254: U1.7 51.08,58.19 51.56,58.67 51.56,62.21 ABL-16.000MHZ-B2.1
N$3
  Top 0.406: R6.2 LED1.C
N$4
  Top 0.406: R7.2 LED2.C
N$5
  Top 0.406: R8.2 LED3.C
N$6
  Top 0.254: R9.2 LED4.C
N$7  (via drill 0.6)
  Top 0.254: IC5.10 49.53,31.02 49.53,30.23 49.78,29.97 v60.71,29.97 | 59.46,17.53 v60.71,17.53
  Top 0.406: Q1.1 59.46,17.53
  Bottom 0.254: v60.71,17.53 v60.71,29.97
N$8  (via drill 0.6)
  Top 0.254: IC5.6 49.75,33.27 48.51,33.27 v48.01,34.04
  Top 0.406: Q2.1 47.01,17.78 47.01,18.31 v48.01,19.05
  Bottom 0.406: v48.01,19.05 v48.01,34.04
N$9
  Top 0.254: U2.7 153.95,58.19 154.43,58.67 154.43,62.21 ABL-16.000MHZ-B1.1
N$10
  Top 0.254: ABL-16.000MHZ-B1.3 152.64,62.23 152.64,55.88 U2.8
N$11
  Top 0.406: R15.2 LED5.C
N$12
  Top 0.406: R16.2 LED6.C
N$13
  Top 0.406: R17.2 LED7.C
N$14
  Top 0.254: R18.2 LED8.C
N$15  (via drill 0.6)
  Top 0.254: IC1.10 152.4,31.02 152.4,30.23 152.65,29.97 v163.58,29.97 | 162.33,17.53 v163.58,17.53
  Top 0.406: Q3.1 162.33,17.53
  Bottom 0.254: v163.58,17.53 v163.58,29.97
N$16  (via drill 0.6)
  Top 0.254: IC1.6 152.62,33.27 151.38,33.27 v150.88,34.04
  Top 0.406: Q4.1 149.88,17.78 149.88,18.31 v150.88,19.05
  Bottom 0.406: v150.88,19.05 v150.88,34.04
N$17
  Top 0.254: U3.7 51.08,153.44 51.56,153.92 51.56,157.46 ABL-16.000MHZ-B3.1
N$18
  Top 0.254: ABL-16.000MHZ-B3.3 49.77,157.48 49.77,151.13 U3.8
N$19
  Top 0.406: R24.2 LED9.C
N$20
  Top 0.406: R25.2 LED10.C
N$21
  Top 0.406: R26.2 LED11.C
N$22
  Top 0.254: R27.2 LED12.C
N$23  (via drill 0.6)
  Top 0.254: IC2.10 49.53,126.27 49.53,125.48 49.78,125.22 v60.71,125.22 | 59.46,112.78 v60.71,112.78
  Top 0.406: Q5.1 59.46,112.78
  Bottom 0.254: v60.71,112.78 v60.71,125.22
N$24  (via drill 0.6)
  Top 0.254: IC2.6 49.75,128.52 48.51,128.52 v48.01,129.29
  Top 0.406: Q6.1 47.01,113.03 47.01,113.56 v48.01,114.3
  Bottom 0.406: v48.01,114.3 v48.01,129.29
N$25
  Top 0.254: U4.7 153.95,153.44 154.43,153.92 154.43,157.46 ABL-16.000MHZ-B4.1
N$26
  Top 0.254: ABL-16.000MHZ-B4.3 152.64,157.48 152.64,151.13 U4.8
N$27
  Top 0.406: R33.2 LED13.C
N$28
  Top 0.406: R34.2 LED14.C
N$29
  Top 0.406: R35.2 LED15.C
N$30
  Top 0.254: R36.2 LED16.C
N$31  (via drill 0.6)
  Top 0.254: IC3.10 152.4,126.27 152.4,125.48 152.65,125.22 v163.58,125.22 | 162.33,112.78 v163.58,112.78
  Top 0.406: Q7.1 162.33,112.78
  Bottom 0.254: v163.58,112.78 v163.58,125.22
N$32  (via drill 0.6)
  Top 0.254: IC3.6 152.62,128.52 151.38,128.52 v150.88,129.29
  Top 0.406: Q8.1 149.88,113.03 149.88,113.56 v150.88,114.3
  Bottom 0.406: v150.88,114.3 v150.88,129.29
RESET  (via drill 0.61 pad 1.02)
  Top 0.305: U1.29 54.81,52.27 v53.59,51.31
  Top 0.406: 40.89,66.29 R3.1 | 40.89,66.29 SW1.2 | J4.5 40.89,66.29
  Bottom 0.305: v53.59,51.31 51.56,52.58 J4.5
RESET1  (via drill 0.61 pad 1.02)
  Top 0.305: U2.29 157.68,52.27 v156.46,51.31
  Top 0.406: 143.76,66.29 R12.1 | 143.76,66.29 SW2.2 | J1.5 143.76,66.29
  Bottom 0.305: v156.46,51.31 154.43,52.58 J1.5
RESET2  (via drill 0.61 pad 1.02)
  Top 0.305: U3.29 54.81,147.52 v53.59,146.56
  Top 0.406: 40.89,161.54 R21.1 | 40.89,161.54 SW3.2 | J2.5 40.89,161.54
  Bottom 0.305: v53.59,146.56 51.56,147.83 J2.5
RESET3  (via drill 0.61 pad 1.02)
  Top 0.305: U4.29 157.68,147.52 v156.46,146.56
  Top 0.406: 143.76,161.54 R30.1 | 143.76,161.54 SW4.2 | J3.5 143.76,161.54
  Bottom 0.305: v156.46,146.56 154.43,147.83 J3.5
SCL
  Top 0.305: U1.28 62.92,51.49 JP2.1
  Top 0.406: JP1.1 28.19,38.1 28.19,58.42 | 28.19,58.42 28.19,82.04 67.06,82.04 | 28.19,58.42 JP8.1 | 72.39,58.42 JP2.1 | 72.39,58.42 72.39,38.1 JP3.1 | 67.06,82.04 72.39,82.04 72.39,58.42 | 67.06,82.04 JP4.1 62.23,73.66 62.23,68.33 R5.2
SCL1
  Top 0.305: U2.28 165.79,51.49 JP7.1
  Top 0.406: JP6.1 131.06,38.1 131.06,58.42 | 131.06,58.42 131.06,82.04 169.93,82.04 | 131.06,58.42 JP5.1 | 175.26,58.42 JP7.1 | 175.26,58.42 175.26,38.1 JP9.1 | 169.93,82.04 175.26,82.04 175.26,58.42 | 169.93,82.04 JP10.1 165.1,73.66 165.1,68.33 R14.2
SCL2
  Top 0.305: U3.28 62.92,146.74 JP21.1
  Top 0.406: JP20.1 28.19,133.35 28.19,153.67 | 28.19,153.67 28.19,177.29 67.06,177.29 | 28.19,153.67 JP19.1 | 72.39,153.67 JP21.1 | 72.39,153.67 72.39,133.35 JP22.1 | 67.06,177.29 72.39,177.29 72.39,153.67 | 67.06,177.29 JP23.1 62.23,168.91 62.23,163.58 R23.2
SCL3
  Top 0.305: U4.28 165.79,146.74 JP30.1
  Top 0.406: JP29.1 131.06,133.35 131.06,153.67 | 131.06,153.67 131.06,177.29 169.93,177.29 | 131.06,153.67 JP28.1 | 175.26,153.67 JP30.1 | 175.26,153.67 175.26,133.35 JP31.1 | 169.93,177.29 175.26,177.29 175.26,153.67 | 169.93,177.29 JP32.1 165.1,168.91 165.1,163.58 R32.2
SDA  (via drill 0.6)
  Top 0.305: U1.27 59.79,50.7 JP3.2
  Top 0.406: JP1.2 33.78,40.64 33.78,60.96 JP8.2 29.46,60.96 29.46,80.77 64.52,80.77 JP4.2 58.93,72.9 R4.2 | v66.8,71.63 66.8,61.21 67.06,60.96 JP2.2
  Bottom 0.254: JP8.2 32,60.71
  Bottom 0.406: JP3.2 66.8,40.64 66.8,60.96 JP2.2 69.85,61.21 | v66.8,71.63 64.52,73.91 JP4.2
SDA1  (via drill 0.6)
  Top 0.305: U2.27 162.66,50.7 JP9.2
  Top 0.406: JP6.2 136.65,40.64 136.65,60.96 JP5.2 132.33,60.96 132.33,80.77 167.39,80.77 JP10.2 161.8,72.9 R13.2 | v169.67,71.63 169.67,61.21 169.93,60.96 JP7.2
  Bottom 0.254: JP5.2 134.87,60.71
  Bottom 0.406: JP9.2 169.67,40.64 169.67,60.96 JP7.2 172.72,61.21 | v169.67,71.63 167.39,73.91 JP10.2
SDA2  (via drill 0.6)
  Top 0.305: U3.27 59.79,145.95 JP22.2
  Top 0.406: JP20.2 33.78,135.89 33.78,156.21 JP19.2 29.46,156.21 29.46,176.02 64.52,176.02 JP23.2 58.93,168.15 R22.2 | v66.8,166.88 66.8,156.46 67.06,156.21 JP21.2
  Bottom 0.254: JP19.2 32,155.96
  Bottom 0.406: JP22.2 66.8,135.89 66.8,156.21 JP21.2 69.85,156.46 | v66.8,166.88 64.52,169.16 JP23.2
SDA3  (via drill 0.6)
  Top 0.305: U4.27 162.66,145.95 JP31.2
  Top 0.406: JP29.2 136.65,135.89 136.65,156.21 JP28.2 132.33,156.21 132.33,176.02 167.39,176.02 JP32.2 161.8,168.15 R31.2 | v169.67,166.88 169.67,156.46 169.93,156.21 JP30.2
  Bottom 0.254: JP28.2 134.87,155.96
  Bottom 0.406: JP31.2 169.67,135.89 169.67,156.21 JP30.2 172.72,156.46 | v169.67,166.88 167.39,169.16 JP32.2
V_BATT
  Top 0.254: 55.37,17.02 54.89,17.5 Q1.3 | IC5.8 46.48,32.26 46.48,27.69
  Top 0.406: R1.1 65.28,40.22 65.28,27.94
  pour Top (isolate 1.778, no thermals): 1.78,92.2 26.16,92.2 26.16,11.68 1.78,11.68
  pour Top (isolate 1.778, no thermals): 21.08,27.94 44.45,27.94 44.45,15.75 21.08,15.75
  pour Top (isolate 1.778, no thermals): 100.58,9.91 73.66,9.91 73.66,11.68 73.41,11.68 73.41,83.57 8.89,83.57 8.89,91.95 92.2,91.95 92.2,91.69 100.58,91.69
  pour Top (isolate 1.778, no thermals): 44.2,16 53.09,15.75 56.39,15.75 73.66,15.75 73.66,27.94 44.2,27.94
V_BATT1  (via drill 0.6, 0.61 pad 1.02)
  Top 0.254: 57.15,5.08 Q1.4 | IC5.9 IC5.2 v55.36,31.76 v55.37,31.75
  Bottom 0.254: v55.37,31.75 57.15,29.97 v57.15,11.68
  pour Top (isolate 1.016, no thermals): 51.05,12.95 66.55,12.95 66.55,1.02 52.58,1.02 51.05,2.79
V_BATT2  (via drill 0.6, 0.61 pad 1.02)
  Top 0.254: v44.45,30.73 44.44,32.76 IC5.7
  Bottom 0.254: v44.45,11.68 v44.45,30.73
  pour Top (isolate 1.016, no thermals): 35.31,13.46 49.28,13.46 49.28,1.27 35.31,1.27
V_BATT3
  Top 0.254: 158.24,17.02 157.76,17.5 Q3.3 | IC1.8 149.35,32.26 149.35,27.69
  Top 0.406: R10.1 168.15,40.22 168.15,27.94
  pour Top (isolate 1.778, no thermals): 104.65,92.2 129.03,92.2 129.03,11.68 104.65,11.68
  pour Top (isolate 1.778, no thermals): 123.95,27.94 147.32,27.94 147.32,15.75 123.95,15.75
  pour Top (isolate 1.778, no thermals): 203.45,9.91 176.53,9.91 176.53,11.68 176.28,11.68 176.28,83.57 111.76,83.57 111.76,91.95 195.07,91.95 195.07,91.69 203.45,91.69
  pour Top (isolate 1.778, no thermals): 147.07,16 155.96,15.75 159.26,15.75 176.53,15.75 176.53,27.94 147.07,27.94
V_BATT4  (via drill 0.6, 0.61 pad 1.02)
  Top 0.254: 160.02,5.08 Q3.4 | IC1.9 IC1.2 v158.23,31.76 v158.24,31.75
  Bottom 0.254: v158.24,31.75 160.02,29.97 v160.02,11.68
  pour Top (isolate 1.016, no thermals): 153.92,12.95 169.42,12.95 169.42,1.02 155.45,1.02 153.92,2.79
V_BATT5  (via drill 0.6, 0.61 pad 1.02)
  Top 0.254: v147.32,30.73 147.31,32.76 IC1.7
  Bottom 0.254: v147.32,11.68 v147.32,30.73
  pour Top (isolate 1.016, no thermals): 138.18,13.46 152.15,13.46 152.15,1.27 138.18,1.27
V_BATT6
  Top 0.254: 55.37,112.27 54.89,112.75 Q5.3 | IC2.8 46.48,127.51 46.48,122.94
  Top 0.406: R19.1 65.28,135.47 65.28,123.19
  pour Top (isolate 1.778, no thermals): 1.78,187.45 26.16,187.45 26.16,106.93 1.78,106.93
  pour Top (isolate 1.778, no thermals): 21.08,123.19 44.45,123.19 44.45,111 21.08,111
  pour Top (isolate 1.778, no thermals): 100.58,105.16 73.66,105.16 73.66,106.93 73.41,106.93 73.41,178.82 8.89,178.82 8.89,187.2 92.2,187.2 92.2,186.94 100.58,186.94
  pour Top (isolate 1.778, no thermals): 44.2,111.25 53.09,111 56.39,111 73.66,111 73.66,123.19 44.2,123.19
V_BATT7  (via drill 0.6, 0.61 pad 1.02)
  Top 0.254: 57.15,100.33 Q5.4 | IC2.9 IC2.2 v55.36,127.01 v55.37,127
  Bottom 0.254: v55.37,127 57.15,125.22 v57.15,106.93
  pour Top (isolate 1.016, no thermals): 51.05,108.2 66.55,108.2 66.55,96.27 52.58,96.27 51.05,98.04
V_BATT8  (via drill 0.6, 0.61 pad 1.02)
  Top 0.254: v44.45,125.98 44.44,128.01 IC2.7
  Bottom 0.254: v44.45,106.93 v44.45,125.98
  pour Top (isolate 1.016, no thermals): 35.31,108.71 49.28,108.71 49.28,96.52 35.31,96.52
V_BATT9
  Top 0.254: 158.24,112.27 157.76,112.75 Q7.3 | IC3.8 149.35,127.51 149.35,122.94
  Top 0.406: R28.1 168.15,135.47 168.15,123.19
  pour Top (isolate 1.778, no thermals): 104.65,187.45 129.03,187.45 129.03,106.93 104.65,106.93
  pour Top (isolate 1.778, no thermals): 123.95,123.19 147.32,123.19 147.32,111 123.95,111
  pour Top (isolate 1.778, no thermals): 203.45,105.16 176.53,105.16 176.53,106.93 176.28,106.93 176.28,178.82 111.76,178.82 111.76,187.2 195.07,187.2 195.07,186.94 203.45,186.94
  pour Top (isolate 1.778, no thermals): 147.07,111.25 155.96,111 159.26,111 176.53,111 176.53,123.19 147.07,123.19
V_BATT10  (via drill 0.6, 0.61 pad 1.02)
  Top 0.254: 160.02,100.33 Q7.4 | IC3.9 IC3.2 v158.23,127.01 v158.24,127
  Bottom 0.254: v158.24,127 160.02,125.22 v160.02,106.93
  pour Top (isolate 1.016, no thermals): 153.92,108.2 169.42,108.2 169.42,96.27 155.45,96.27 153.92,98.04
V_BATT11  (via drill 0.6, 0.61 pad 1.02)
  Top 0.254: v147.32,125.98 147.31,128.01 IC3.7
  Bottom 0.254: v147.32,106.93 v147.32,125.98
  pour Top (isolate 1.016, no thermals): 138.18,108.71 152.15,108.71 152.15,96.52 138.18,96.52
V_BATT_ADC
  Top 0.305: U1.23 55.12,47.85 55.12,45.72 56.39,44.45 58.17,44.45 58.76,43.85 R2.1
  Top 0.406: R2.1 R1.2
V_BATT_ADC1
  Top 0.305: U2.23 157.99,47.85 157.99,45.72 159.26,44.45 161.04,44.45 161.63,43.85 R11.1
  Top 0.406: R11.1 R10.2
V_BATT_ADC2
  Top 0.305: U3.23 55.12,143.1 55.12,140.97 56.39,139.7 58.17,139.7 58.76,139.1 R20.1
  Top 0.406: R20.1 R19.2
V_BATT_ADC3
  Top 0.305: U4.23 157.99,143.1 157.99,140.97 159.26,139.7 161.04,139.7 161.63,139.1 R29.1
  Top 0.406: R29.1 R28.2
VCC_5V
  Top 0.254: U1.18 51.05,47.91 51.05,49.02 51.88,49.85 U1.6 51.88,57.33 53.48,58.93 | 37.34,66.29 R3.2 | 53.48,58.93 U1.4 | 53.48,58.93 53.48,59.3 C3.1
  Top 0.305: C1.1 51.31,45.47 | 51.31,45.47 51.05,45.72 51.05,47.85 U1.18 | U1.20 52.68,47.85 52.58,47.75 52.58,46.74 51.31,45.47
  Top 0.813: REG.3 38.35,32.26 38.35,43.69 | 38.35,43.69 J4.2 35.31,47.5 35.31,66.29 37.34,66.29 37.34,78.64 | 37.34,78.64 LED4.A | 37.34,78.64 LED3.A LED2.A LED1.A 57.06,78.64 R4.1 R5.1 | C2.1 C1.1 38.61,43.43 38.35,43.69
VCC_5V1
  Top 0.254: U2.18 153.92,47.91 153.92,49.02 154.75,49.85 U2.6 154.75,57.33 156.35,58.93 | 140.21,66.29 R12.2 | 156.35,58.93 U2.4 | 156.35,58.93 156.35,59.3 C5.1
  Top 0.305: C4.1 154.18,45.47 | 154.18,45.47 153.92,45.72 153.92,47.85 U2.18 | U2.20 155.55,47.85 155.45,47.75 155.45,46.74 154.18,45.47
  Top 0.813: REG1.3 141.22,32.26 141.22,43.69 | 141.22,43.69 J1.2 138.18,47.5 138.18,66.29 140.21,66.29 140.21,78.64 | 140.21,78.64 LED8.A | 140.21,78.64 LED7.A LED6.A LED5.A 159.93,78.64 R13.1 R14.1 | C6.1 C4.1 141.48,43.43 141.22,43.69
VCC_5V2
  Top 0.254: U3.18 51.05,143.16 51.05,144.27 51.88,145.1 U3.6 51.88,152.58 53.48,154.18 | 37.34,161.54 R21.2 | 53.48,154.18 U3.4 | 53.48,154.18 53.48,154.54 C8.1
  Top 0.305: C7.1 51.31,140.72 | 51.31,140.72 51.05,140.97 51.05,143.1 U3.18 | U3.20 52.68,143.1 52.58,143 52.58,141.99 51.31,140.72
  Top 0.813: REG2.3 38.35,127.51 38.35,138.94 | 38.35,138.94 J2.2 35.31,142.75 35.31,161.54 37.34,161.54 37.34,173.89 | 37.34,173.89 LED12.A | 37.34,173.89 LED11.A LED10.A LED9.A 57.06,173.89 R22.1 R23.1 | C9.1 C7.1 38.61,138.68 38.35,138.94
VCC_5V3
  Top 0.254: U4.18 153.92,143.16 153.92,144.27 154.75,145.1 U4.6 154.75,152.58 156.35,154.18 | 140.21,161.54 R30.2 | 156.35,154.18 U4.4 | 156.35,154.18 156.35,154.54 C11.1
  Top 0.305: C10.1 154.18,140.72 | 154.18,140.72 153.92,140.97 153.92,143.1 U4.18 | U4.20 155.55,143.1 155.45,143 155.45,141.99 154.18,140.72
  Top 0.813: REG3.3 141.22,127.51 141.22,138.94 | 141.22,138.94 J3.2 138.18,142.75 138.18,161.54 140.21,161.54 140.21,173.89 | 140.21,173.89 LED16.A | 140.21,173.89 LED15.A LED14.A LED13.A 159.93,173.89 R31.1 R32.1 | C12.1 C10.1 141.48,138.68 141.22,138.94

## Text on the board
_tsilk: MOTOR- | GND | SDA | SCL | MOTOR- | MOTOR- | GND | SDA | SCL | MOTOR- | GND | GND | GND | GND | MOTOR+ | MOTOR+ | MOTOR+ | MOTOR+ | SDA | SDA | SDA | SDA | SCL | SCL | SCL | SCL | GND | RESET | GND | RESET | MOSI | SCK | MOSI | SCK | VCC_5V | MISO | VCC_5V | MISO | GND | GND | GND | GND | SDA | SDA | SDA | SDA | MOTOR- | MOTOR- | MOTOR- | MOTOR- | SCL | SCL | SCL | SCL | GND | GND | V_BATT | VCC_5V | V_BATT | VCC_5V | MOTOR+ | MOTOR+ | MOTOR+ | MOTOR+ | BATT2+ | BATT2+ | BATT1- | BATT2- | BATT1- | BATT2- | BATT1+ | BATT1+ | MOTOR- | MOTOR- | MOTOR- | MOTOR- | GND | SDA | SCL | GND | SDA | SCL | GND | GND | GND | GND | MOTOR+ | MOTOR+ | MOTOR+ | MOTOR+ | SDA | SDA | SDA | SDA | SCL | SCL | SCL | SCL | GND | RESET | GND | RESET | MOSI | SCK | MOSI | SCK | VCC_5V | MISO | VCC_5V | MISO | GND | GND | GND | GND | SDA | SDA | SDA | SDA | MOTOR- | MOTOR- | MOTOR- | MOTOR- | SCL | SCL | SCL | SCL | GND | GND | V_BATT | VCC_5V | V_BATT | VCC_5V | MOTOR+ | MOTOR+ | MOTOR+ | MOTOR+ | BATT2+ | BATT2+ | BATT1- | BATT2- | BATT1- | BATT2- | BATT1+ | BATT1+